# Altium PCB PCB1.PcbDoc
Units mm, origin at the board's own origin, x right, y up, seen from the top; angles counter-clockwise.
Board outline 50 x 100.33 mm, 2 copper layers (Top Layer, Bottom Layer); 51 components, 38 nets, 157 pads, 20 vias.
Unrouted connection lines stored in the file: 2.
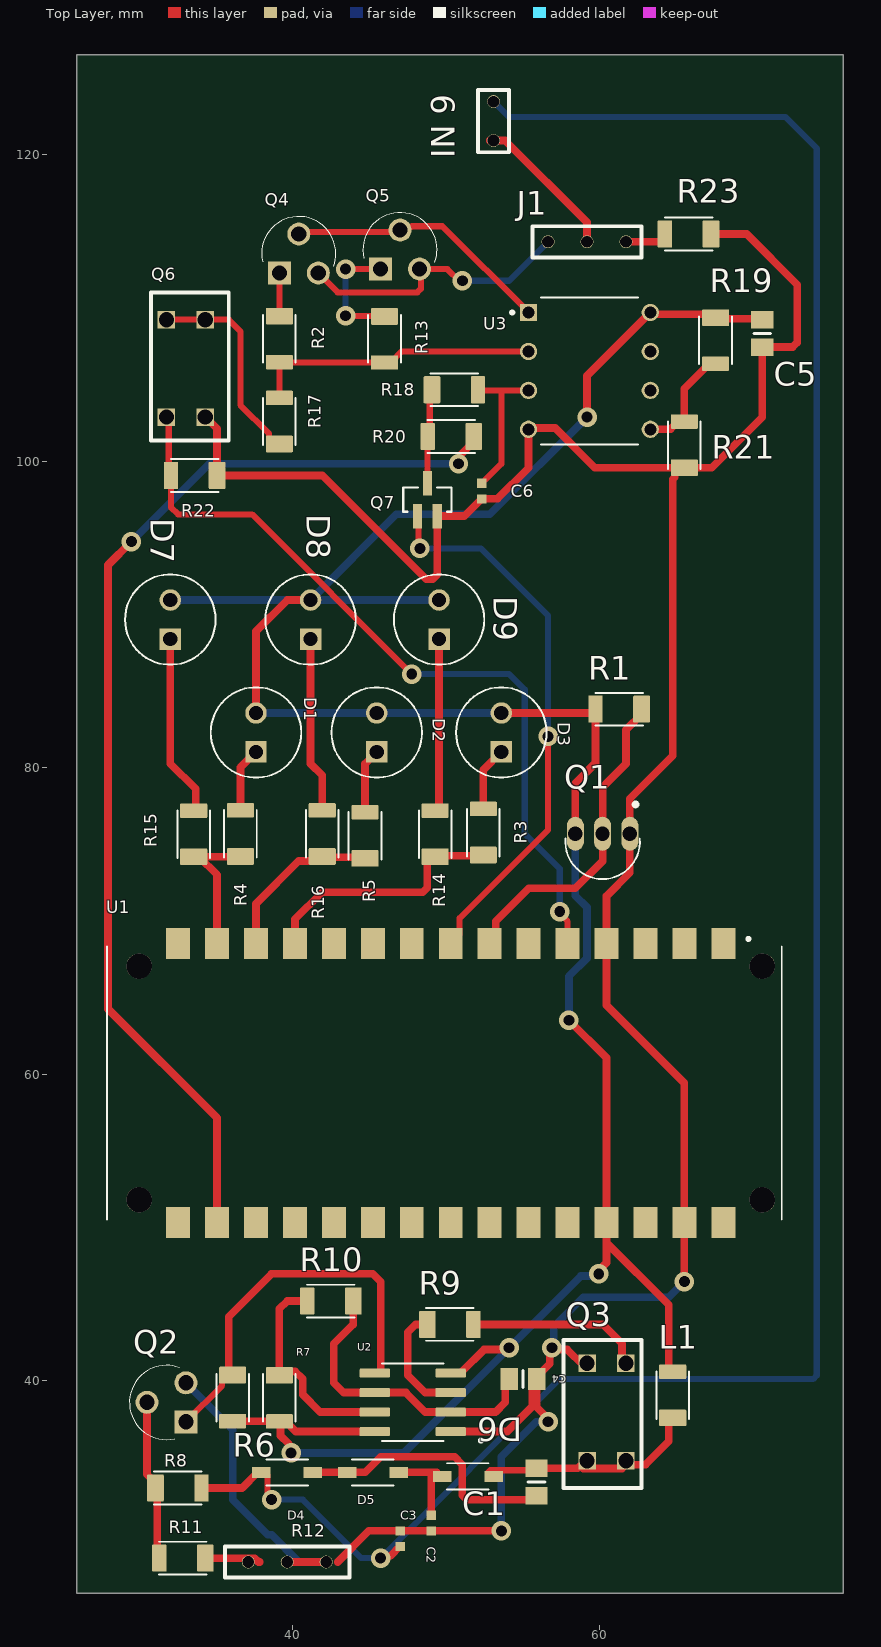
[diagram p0: Top Layer view]
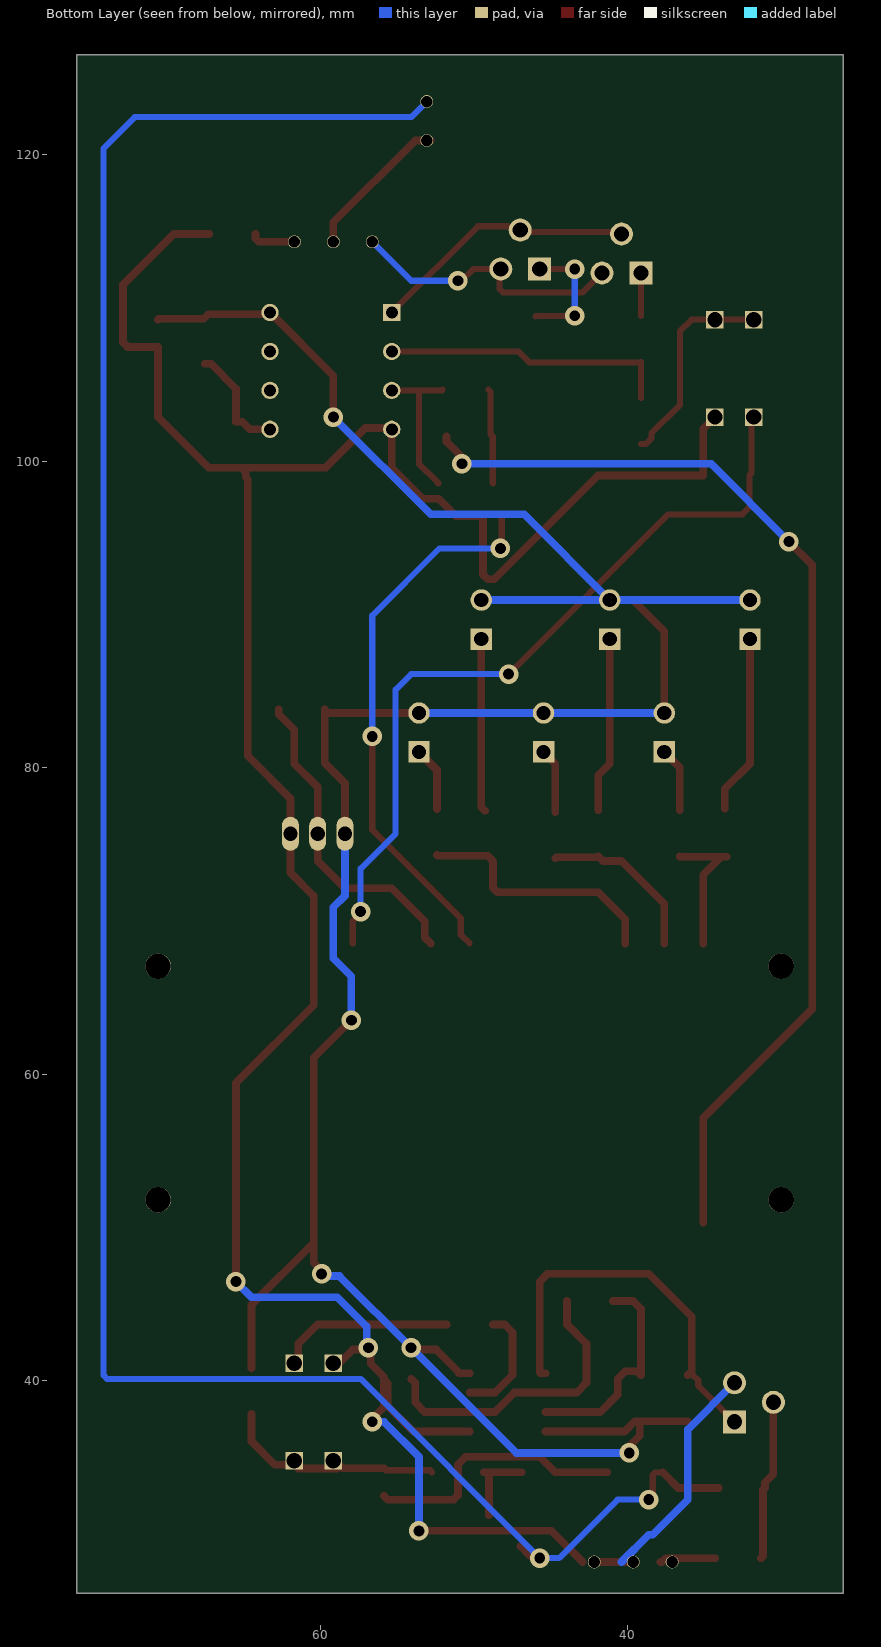
[diagram p1: Bottom Layer view, seen from below]

## Layer stack, top to bottom
Top Solder: solder mask 0.0102, Solder Resist, Dk 3.5
Top Layer: signal copper 0.0356
Dielectric 1: dielectric 0.32, FR-4, Dk 4.8
Bottom Layer: signal copper 0.0356
Bottom Solder: solder mask 0.0102, Solder Resist, Dk 3.5

## Board outline
25.908,26.162 25.908,126.492 75.908,126.492 75.908,26.162

## Design rules (kind name [scope] priority, off if disabled: settings)
Clearance [All] p1: gap=0.254 ignorepadtopadclearanceinfootprint=FALSE except(0: Arc-Hole Track-Hole SMDPad-Hole THPad-Hole Via-Hole Fill-Hole Poly-Hole Region-Hole Text-Hole)
PolygonConnect [All] p1: connectstyle=Relief reliefconductorwidth=0.254 reliefentries=4 polygonreliefangle="90 Angle" airgapwidth=0.254
RoutingVias [All] p1: holewidth=0.711 width=1.27 viastyle="Through Hole" minholewidth=0.711 minwidth=1.27 maxholewidth=0.711 maxwidth=1.27
SolderMaskExpansion [All] p1: expansion=0.102 istentingtop=FALSE
Width [All] p1: maxlimit=0.5 minlimit=0.254 preferedwidth=0.254 minimp=50.000000 maximp=50.000000 favimp=50.000000
30 further rules are at their usual default settings.

## Components (designator, comment, footprint, x,y, rotation, side; value= is the part's Value field where it differs from the comment)
C1 "100nF" "CAP 0805" 55.88,33.412 r270 top
C2 "2.2uF" "CAP 1005" 49.022,30.734 r270 top
C3 "2.2uF" "CAP 1005" 46.99,29.718 r90 top
C4 "330pF" "CAP 0805" 55.002,40.132 r180 top
C5 "100nF" "CAP 0805" 70.612,108.32 r270 top
C6 "1uF" "CAP 1005" 52.324,98.044 r270 top
D1 "LED" LED 37.592,82.296 r90 top
D2 "LED" LED 45.466,82.296 r90 top
D3 "LED" LED 53.594,82.296 r90 top
D4 "GEN" MUR160G 39.624,34.036 r180 top
D5 "GEN" MUR160G 45.212,34.036 r180 top
D6 "GEN" MUR160G 51.406,33.782 r180 top
D7 "LED" LED 32.004,89.662 r90 top
D8 "LED" LED 41.148,89.662 r90 top
D9 "LED" LED 49.53,89.662 r90 top
"IN 9" "IN_9 CONNECTOR" "IN 9" 53.086,123.444 r270 top
J1 "3 PIN CONNECTOR" "3 PIN CONNECTOR" 56.642,114.3 r0 top
L1 "47uF" "INDUCTOR 47uH" 64.77,39.094 r90 top
Q1 "DS18B20" DS18B20 60.198,75.692 r180 top
Q2 "BC547" BC547 31.75,38.608 r90 top
Q3 "IRLD110" IRLD110 61.722,41.148 r270 top
Q4 "MPSA42" MPSA42 40.386,113.538 r0 top
Q5 "MPSA42" MPSA42 46.99,113.792 r0 top
Q6 "IRLD110" IRLD110 31.75,102.87 r90 top
Q7 "2N7000" 2N7000 48.768,97.482 r0 top
R1 "47R" "RES 1206" 61.236,83.82 r180 top
R2 "220R" "RES 1206" 39.116,107.95 r270 top
R3 "330R" "RES 1206" 52.418,75.808 r90 top
R4 "330R" "RES 1206" 36.576,75.713 r90 top
R5 "330R" "RES 1206" 44.704,75.586 r90 top
R6 "27k" "RES 1206" 36.068,38.884 r270 top
R7 "3k3" "RES 1206" 39.116,38.862 r270 top
R8 "820k" "RES 1206" 32.533,33.02 r0 top
R9 "47R" "RES 1206" 50.27,43.688 r0 top
R10 "27k" "RES 1206" 42.44,45.212 r180 top
R11 "2k2" "RES 1206" 32.788,28.448 r180 top
R12 "4k7" POTENTIOMETER 42.164,28.194 r180 top
R13 "220R" "RES 1206" 45.974,107.929 r270 top
R14 "330R" "RES 1206" 49.276,75.692 r90 top
R15 "330R" "RES 1206" 33.528,75.692 r90 top
R16 "330R" "RES 1206" 41.91,75.713 r90 top
R17 "150R" "RES 1206" 39.116,102.616 r90 top
R18 "10k" "RES 1206" 50.567,104.648 r0 top
R19 "10k" "RES 1206" 67.564,107.845 r270 top
R20 "1K" "RES 1206" 50.292,101.6 r180 top
R21 "10k" "RES 1206" 65.532,101.07 r90 top
R22 "100k" "RES 1206" 33.55,99.06 r180 top
R23 "820R" "RES 1206" 65.765,114.808 r180 top
U1 "Ardino Uno" "ARDUINO NANO" 50.292,59.436 r180 top
U2 "ICM755" ICM7555 47.815,38.608 r180 top
U3 "LM6142" LM6142 59.339,105.879 r0 top

## Footprints (in the part's own frame and the unit in brackets; to place one, negate y for a bottom-side part, rotate by r counter-clockwise, add the part's x,y. Pads: shape width x height; smd on the part's side, far side on the other; paste and mask are expansions set on the pad)
2N7000 [mm]
  rect 0.6x1.6 smd: 1(-0.65,-1.07) 2(0.65,-1.07) 3(0,1.07)
  silkscreen extent -1.57,-0.79 1.57,0.79
"3 PIN CONNECTOR" [mil]
  round 33 hole 30: 1(0,0) 2(100,0) 3(200,0)
  silkscreen extent -40,-40 240,40
"ARDUINO NANO" [mm]
  rect 1.56x2 smd: 1(-17.78,-9.1) 2(-15.24,-9.1) 3(-12.7,-9.1) 4(-10.16,-9.1) 5(-7.62,-9.1) 6(-5.08,-9.1) 7(-2.54,-9.1) 8(0,-9.1) 9(2.54,-9.1) 10(5.08,-9.1) 11(7.62,-9.1) 12(10.16,-9.1) 13(12.7,-9.1) 14(15.24,-9.1) 15(17.78,-9.1) 16(17.78,9.1) 17(15.24,9.1) 18(12.7,9.1) 19(10.16,9.1) 20(7.62,9.1) 21(5.08,9.1) 22(2.54,9.1) 23(0,9.1) 24(-2.54,9.1) 25(-5.08,9.1) 26(-7.62,9.1) 27(-10.16,9.1) 28(-12.7,9.1) 29(-15.24,9.1) 30(-17.78,9.1)
  round 1.651 hole 1.651 unplated: ""(-20.32,-7.62) ""(-20.32,7.62) ""(20.32,-7.62) ""(20.32,7.62)
  silkscreen extent -21.59,-9.5 22.41,8.89
BC547 [mil]
  rect 59x59 hole 39: 1(-50,-50)
  round 59 hole 39: 2(0,50) 3(50,-50)
  silkscreen extent -96,-33 95,95
"CAP 0805" [mm]
  rect 1.15x1.45 smd: 1(-0.9,0) 2(0.9,0)
  silkscreen extent 0,-0.55 0,0.55
"CAP 1005" [mm]
  rect 0.59x0.63 smd: 1(-0.508,0) 2(0.508,0)
DS18B20 [mm]
  oval 1.11x2.22 hole 0.93: 1(-1.778,0) 2(0,0) 3(1.778,0)
  silkscreen extent -2.43,-2.03 2.43,2.96
ICM7555 [mm]
  rrect25% 1.97x0.59 smd: 1(-2.475,1.905) 2(-2.475,0.635) 3(-2.475,-0.635) 4(-2.475,-1.905) 5(2.475,-1.905) 6(2.475,-0.635) 7(2.475,0.635) 8(2.475,1.905)
  silkscreen extent -4.54,-2.52 2,2.59
"IN 9" [mil]
  round 33 hole 30: 1(0,0) 2(100,0)
  silkscreen extent -30,-40 130,40
"INDUCTOR 47uH" [mm]
  rrect14% 1.09x1.77 smd: 1(-1.502,0)
  rrect14% 0.94x1.77 smd: 2(1.503,0)
  silkscreen extent -1.59,-1.06 1.51,1.06
IRLD110 [mm]
  rect 1.14x1.14 hole 1: D(6.35,0) D(6.35,-2.54) G(0,0) S(0,-2.54)
  silkscreen extent -1.52,-4.06 8.13,1.02
LED [mm]
  round 1.4 hole 0.93: A(1.27,0)
  rect 1.4x1.4 hole 0.93: C(-1.27,0)
  silkscreen extent -2.95,-2.95 2.95,2.95
LM6142 [mm]
  rect 1.13x1.13 hole 0.78: 1(-3.97,3.81)
  round 1.13 hole 0.78: 2(-3.97,1.27) 3(-3.97,-1.27) 4(-3.97,-3.81) 5(3.97,-3.81) 6(3.97,-1.27) 7(3.97,1.27) 8(3.97,3.81)
  silkscreen extent -5.13,-4.79 3.17,4.79, body extent -4.63,-5.46 4.63,5.46, height 5.33
MPSA42 [mil]
  rect 59x59 hole 39: 1(-50,-50)
  round 59 hole 39: 2(0,50) 3(50,-50)
  silkscreen extent -96,-33 95,95
MUR160G [mm]
  rect 1.21x0.72 smd: A(-1.68,0) C(1.68,0)
  silkscreen extent -1.35,-0.85 1.35,0.85
POTENTIOMETER [mil]
  round 33 hole 30: 1(0,0) 2(100,0) 3(200,0)
  silkscreen extent -60,-40 260,40
"RES 1206" [mm]
  rrect14% 1.09x1.77 smd: 1(-1.502,0)
  rrect14% 0.94x1.77 smd: 2(1.503,0)
  silkscreen extent -1.59,-1.06 1.51,1.06

## Part data
C1 C5: library part "CAP 100nF"
C2 C3: library part "CAP 2.2uF"
C4: library part "CAP 330pF"
C6: library part "CAP 1uF"
D4 D5 D6: library part Diode
L1: library part "INDUCTOR 47uH"
R1 R9: library part "RES 47R"
R2 R13: library part "RES 220R"
R3 R4 R5 R14 R15 R16: library part "RES 330"
R6 R10: library part "RES 27K"
R7: library part "RES 3K3"
R8: library part "RES 820K"
R11: library part "RES 2K2"
R12: library part POTENTIOMETER
R17: library part "RES 150R"
R18 R19 R21: library part "RES 10K"
R20: library part "RES 1K"
R22: library part "RES 100K"
R23: library part "RES 820R"
U1: library part "ARDUINO NANO"
U2: Supplier Part Number 1=ICM7555ISA+TCT-ND, Supplier 1=Digi-Key

## Via types
v1: diameter 1.27, hole 0.711, Top Layer to Bottom Layer, 20 vias

## Nets (pads, with @x,y where several pads share a name; then routed paths per layer and width w, separated by ;. In a path a pad name is that pad's centre, name@x,y a point inside that pad or via, vN(x,y) a via of type N, cw(c..) or ccw(c..) an arc to the next point about the centre after c; other vN are vias at no path point)
3V3: R20.1 U1.17 | length 73.6
  Top Layer w0.5: v1(29.464,94.742) 27.94,93.218 27.94,64.262 35.052,57.15 U1.17 ; v1(50.8,99.822) 50.947,99.969 50.947,100.413 51.794,101.26 R20.1
  Bottom Layer w0.5: v1(29.464,94.742) 34.544,99.822 v1(50.8,99.822)
5V: C5.1 D1.A D2.A D3.A D7.A D8.A D9.A L1.2 Q1.3 R1.2 R6.2 R7.2 R19.1 U1.27 U2.4 U2.8 U3.8 | length 179.1
  Top Layer w0.5: R6.2 36.079,37.37 39.105,37.37 R7.2 ; D1.A 37.592,88.9 39.624,90.932 D8.A ; v1(39.878,35.306) 39.731,35.453 39.731,35.891 39.19,36.432 39.19,37.286 R7.2 ; U2.8 40.187,36.703 39.531,37.359 R7.2 ; U2.4 50.98,40.513 51.025,40.558 51.025,40.611 52.463,42.049 53.987,42.049 v1(54.102,42.164) ; D3.A 59.513,83.566 R1.2@59.733,83.786 ; v1(58.004,63.53) 60.452,61.082 U1.27 60.452,49.022 ; Q1.3 58.42,78.994 59.733,80.307 R1.2@59.733,83.786 ; v1(59.182,102.87) 59.182,105.562 U3.8 63.429,109.569 67.342,109.569 R19.1 67.627,109.283 70.549,109.283 C5.1 ; R1.2 R1.2@59.733,83.786 ; v1(59.944,46.99) 59.944,47.198 60.452,47.706 60.452,49.022 ; L1.2@64.516,40.851 64.516,44.958 60.452,49.022
  Bottom Layer w0.5: D7.A D8.A ; D1.A D2.A D3.A ; v1(39.878,35.306) 47.244,35.306 v1(54.102,42.164) 58.781,46.843 59.797,46.843 v1(59.944,46.99) ; D9.A D8.A ; v1(58.004,63.53) 58.004,66.386 59.182,67.564 59.182,70.887 58.42,71.649 Q1.3 ; v1(59.182,102.87) 52.832,96.52 46.736,96.52 D8.A
150V: "IN 9.1" C3.1 D4.C R8.2 | length 151.8
  Top Layer w0.4: D4.C@37.699,34.036 D4.C 38.189,34.036 38.349,33.876 38.349,32.752 38.608,32.493 v1(38.608,32.258) ; C3.1@46.97,29.21 C3.1
  Top Layer w0.5: R8.2 36.683,33.02 D4.C@37.699,34.036 ; 46.374,28.614 C3.1@46.97,29.21
  Bottom Layer w0.4: v1(38.608,32.258) 40.64,32.258 44.45,28.448 v1(45.72,28.448) 57.404,40.132 58.416,40.132 58.424,40.124 73.926,40.124 74.168,40.366 74.168,120.396 72.136,122.428 54.102,122.428 53.086,123.444
GND: C2.2 C3.2 C4.1 C5.2 C6.2 Q1.1 Q2.3 Q3.S Q6.S Q7.2 R12.1 R12.2 R21.1 R22.1 R23.1 U1.4 U1.29 U2.1 U3.4 | length 192.5
  Top Layer w0.5: Q6.S 35.052,102.108 R22.1 41.91,99.06 48.688,92.282 49.102,92.282 49.418,92.598 Q7.2 51.18,96.412 52.304,97.536 C6.2 53.34,97.536 55.369,99.565 U3.4 55.455,102.155 57.103,102.155 59.69,99.568 R21.1@65.192,99.568 ; R12.2 R12.1 ; 42.926,28.194 44.958,30.226 C3.2 C2.2 v1(53.594,30.226) ; U2.1 53.975,36.703 55.626,38.354 55.626,39.856 C4.1 ; v1(56.642,37.338) 56.642,37.546 55.902,38.286 C4.1 ; Q3.S@58.928,41.021 57.901,42.048 57.012,42.048 v1(56.896,42.164) 56.749,42.017 56.749,41.129 55.902,40.282 C4.1 ; v1(65.532,46.482) U1.29 65.532,59.436 60.452,64.516 U1.4 60.452,71.628 61.976,73.152 Q1.1 61.976,77.978 64.77,80.772 64.77,98.806 64.897,98.933 64.897,99.273 R21.1@65.192,99.568 ; R23.1 69.596,114.808 72.898,111.506 72.898,107.735 72.605,107.442 70.634,107.442 C5.2 70.612,102.87 67.31,99.568 R21.1 R21.1@65.192,99.568
  Bottom Layer w0.5: Q2.3 36.068,36.83 36.068,32.258 38.354,29.972 38.608,29.972 40.386,28.194 ; v1(53.594,30.226) 53.594,35.052 55.88,37.338 v1(56.642,37.338) ; v1(56.896,42.164) 57.011,42.279 57.011,43.549 58.928,45.466 64.516,45.466 v1(65.532,46.482)
NetC1_1: C1.1 D6.A L1.1 Q3.D | length 14.5
  Top Layer w0.4: D6.A@52.734,34.036 52.872,34.174 55.742,34.174 C1.1
  Top Layer w0.5: C1.1 58.569,34.312 Q3.D@58.928,34.671 ; Q3.D@58.928,34.29 Q3.D@61.468,34.29 ; Q3.D@61.468,34.671 61.595,34.544 62.992,34.544 64.516,36.068 L1.1@64.516,37.846
NetC1_2: C1.2 D4.A D5.C | length 17.4
  Top Layer w0.5: D4.A D5.C 44.704,34.036 45.72,35.052 50.546,35.052 51.054,34.544 51.054,32.551 51.347,32.258 55.626,32.258 C1.2
NetC2_1: C2.1 D5.A D6.C | length 5.3
  Top Layer w0.5: D5.A D6.C@49.132,34.036 ; C2.1 49.022,33.926 D6.C@49.132,34.036 ; D6.C@49.374,34.036 D6.C@49.132,34.036
NetC4_2: C4.2 R10.1 U2.2 U2.6 | length 19.7
  Top Layer w0.5: R10.1 43.942,43.688 42.672,42.418 42.672,39.878 43.307,39.243 U2.6 47.371,39.243 48.641,37.973 53.213,37.973 53.848,38.608 53.848,39.878 C4.2
NetC6_1: C6.1 R18.2 U3.3 | length 9.9
  Top Layer w0.4: R18.2 52.109,104.609 53.594,104.609 ; C6.1 52.344,98.552 52.439,98.647 52.439,98.667 53.594,99.822 53.594,104.609 ; U3.3 53.594,104.609
NetD1_C: D1.C R4.2 | length 4.2
  Top Layer w0.5: R4.2 36.576,80.01 D1.C
NetD2_C: D2.C R5.2 | length 4.3
  Top Layer w0.5: R5.2 44.704,80.264 D2.C
NetD3_C: D3.C R3.2 | length 4.2
  Top Layer w0.5: R3.2 52.418,79.85 D3.C
NetD7_C: D7.C R15.2 | length 11.7
  Top Layer w0.5: D7.C 32.004,80.264 33.655,78.613 R15.2@33.655,77.343
NetD8_C: D8.C R16.2 | length 11.5
  Top Layer w0.5: D8.C 41.148,80.264 41.91,79.502 R16.2
NetD9_C: D9.C R14.2 | length 11.3
  Top Layer w0.5: R14.2 49.31,77.195 49.53,77.415 D9.C
"NetIN 9_2": "IN 9.2" J1.2 | length 9.8
  Top Layer w0.5: 52.832,120.904 53.086,120.904 53.848,120.904 59.182,115.57 J1.2
NetJ1_1: J1.1 Q4.3 Q5.3 | length 18.4
  Top Layer w0.4: Q4.3 42.926,110.998 48.114,110.998 48.348,111.232 48.348,112.434 Q5.3 50.069,112.522 50.831,111.76 v1(51.054,111.76)
  Bottom Layer w0.4: v1(51.054,111.76) 54.102,111.76 J1.1
NetJ1_3: J1.3 R23.2 | length 2.9
  Top Layer w0.5: J1.3 64.042,114.3 64.262,114.52 R23.2
NetQ1_2: Q1.2 R1.1 U1.7 | length 21.2
  Top Layer w0.5: U1.7 53.222,68.926 53.222,69.986 55.372,72.136 58.42,72.136 60.198,73.914 Q1.2 60.198,78.74 61.722,80.264 61.722,82.464 62.738,83.48 R1.1
NetQ2_1: Q2.1 R6.1 U2.5 | length 26
  Top Layer w0.4: Q2.1 35.383,39.701 35.383,40.041 35.728,40.386 R6.1
  Top Layer w0.5: R6.1 35.814,40.64 35.814,44.196 38.608,46.99 45.212,46.99 45.72,46.482 45.72,40.558 45.675,40.513 U2.5
NetQ2_2: Q2.2 R8.1 R11.2 | length 10.5
  Top Layer w0.5: Q2.2 30.48,33.911 31.031,33.36 R8.1 31.158,32.893 31.158,28.575 R11.2
NetQ3_G: Q3.G R9.2 | length 11.6
  Top Layer w0.5: R9.2 60.198,43.688 61.468,42.418 Q3.G@61.468,41.021
NetQ4_1: Q4.1 R2.1 | length 2.8
  Top Layer w0.4: R2.1 Q4.1
NetQ4_2: Q4.2 Q5.2 U3.1 | length 17.5
  Top Layer w0.4: Q4.2 40.513,114.935 46.863,114.935 47.2,115.272 47.73,115.272 47.774,115.316 49.742,115.316 U3.1
NetQ5_1: Q5.1 R13.1 | length 7.6
  Top Layer w0.4: v1(43.434,109.474) 43.456,109.452 45.953,109.452 R13.1 ; v1@43.688,112.522 Q5.1
  Bottom Layer w0.4: v1(43.434,109.474) v1(43.434,112.522)
NetQ6_D: Q6.D R17.1 | length 13.7
  Top Layer w0.4: Q6.D@31.75,109.22 34.29,109.22 35.814,109.22 36.576,108.458 36.576,103.654 38.431,101.799 38.431,101.459 38.776,101.114 R17.1
NetQ6_G: Q6.G R22.2 U1.5 | length 51.7
  Top Layer w0.4: Q6.G 31.899,102.721 31.899,99.208 R22.2 32.047,96.985 32.512,96.52 37.338,96.52 v1(47.752,86.106) ; v1(57.404,70.612) 57.404,70.484 57.912,69.976 U1.5
  Bottom Layer w0.4: v1(47.752,86.106) 54.102,86.106 55.118,85.09 55.118,75.692 57.404,73.406 v1(57.404,70.612)
NetQ7_1: Q7.1 U1.8 | length 36.4
  Top Layer w0.4: Q7.1 48.199,96.331 48.199,94.382 v1(48.279,94.302) ; U1.8 50.872,69.116 50.872,70.176 56.642,75.946 v1(56.642,82.042)
  Bottom Layer w0.4: v1(48.279,94.302) 52.256,94.302 56.642,89.916 v1(56.642,82.042)
NetQ7_3: Q7.3 R18.1 R20.2 | length 6.2
  Top Layer w0.4: Q7.3 48.779,98.563 48.779,101.589 R20.2 48.927,101.738 48.927,104.51 R18.1
NetR2_2: R2.2 R13.2 R17.2 U3.2 | length 18.9
  Top Layer w0.4: R17.2 R2.2 39.127,106.437 46.4,106.437 47.112,107.149 U3.2
NetR3_1: R3.1 R14.1 U1.12 | length 16.6
  Top Layer w0.5: U1.12 40.132,70.104 41.91,71.882 48.475,71.882 48.768,72.175 48.768,73.895 49.121,74.248 52.36,74.248 R3.1
NetR4_1: R4.1 R15.1 U1.14 | length 9.5
  Top Layer w0.5: U1.14 35.052,73.006 33.868,74.19 R15.1 33.539,74.2 33.868,74.2 36.565,74.2 R4.1
NetR5_1: R5.1 R16.1 U1.13 | length 11
  Top Layer w0.5: U1.13 37.592,71.12 40.388,73.916 41.615,73.916 R16.1 41.974,74.147 44.64,74.147 R5.1
NetR7_1: R7.1 R10.2 U2.7 | length 14.4
  Top Layer w0.5: R10.2 39.624,45.212 39.116,44.704 R7.1 39.392,40.64 40.132,40.64 40.64,40.132 40.64,39.116 41.783,37.973 U2.7
NetR9_1: R9.1 U2.3 | length 7.5
  Top Layer w0.5: R9.1 48.006,43.688 47.498,43.18 47.498,40.386 48.641,39.243 U2.3
NetR11_1: R11.1 R12.3 | length 3.7
  Top Layer w0.5: R11.1 37.5,28.448 37.754,28.194 37.846,28.194
NetR19_2: R19.2 R21.2 U3.5 | length 7.3
  Top Layer w0.5: U3.5 63.32,102.08 64.624,102.08 65.117,102.573 R21.2 65.532,104.725 67.149,106.342 R19.2
NetU3_6: U3.6 U3.7
pads on no net: U1. U1.1 U1.2 U1.3 U1.6 U1.9 U1.10 U1.11 U1.15 U1.16 U1.18 U1.19 U1.20 U1.21 U1.22 U1.23 U1.24 U1.25 U1.26 U1.28 U1.30

## Silkscreen, mask and mechanical layers (free items; w line width, h text height)
Mechanical 15:
  the board outline again, w1